# Altium PCB US-026-V1.3.PcbDoc
Units mm, origin at the board's own origin, x right, y up, seen from the top; angles counter-clockwise.
Board outline 43.94 x 19.94 mm, 2 copper layers (Top Layer, Bottom Layer); 10 components, 11 nets, 40 pads, 0 vias.
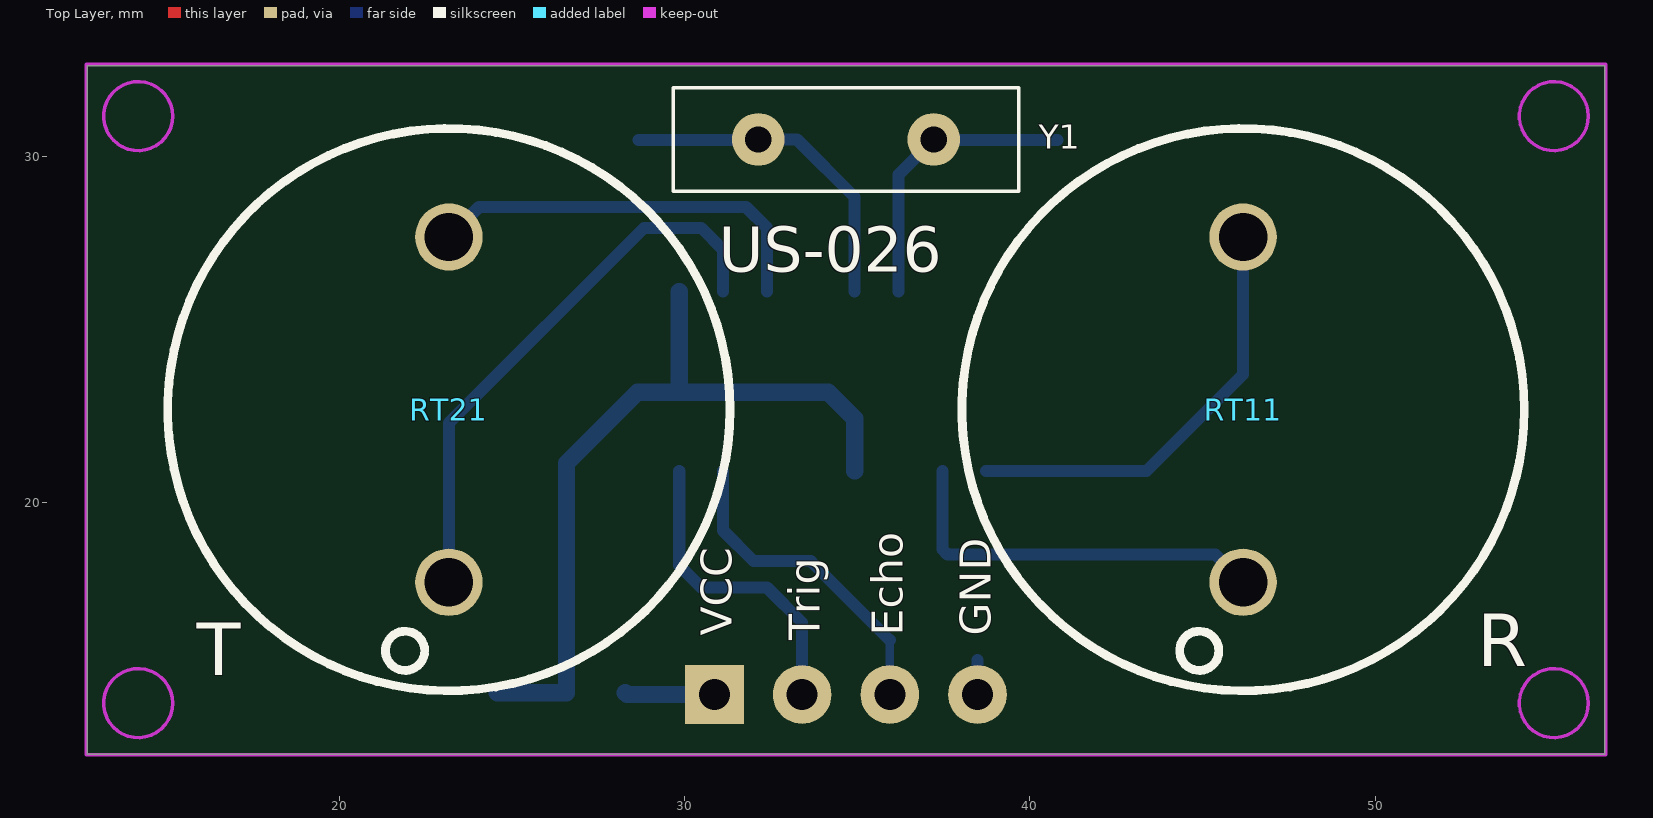
[diagram p0: Top Layer view]
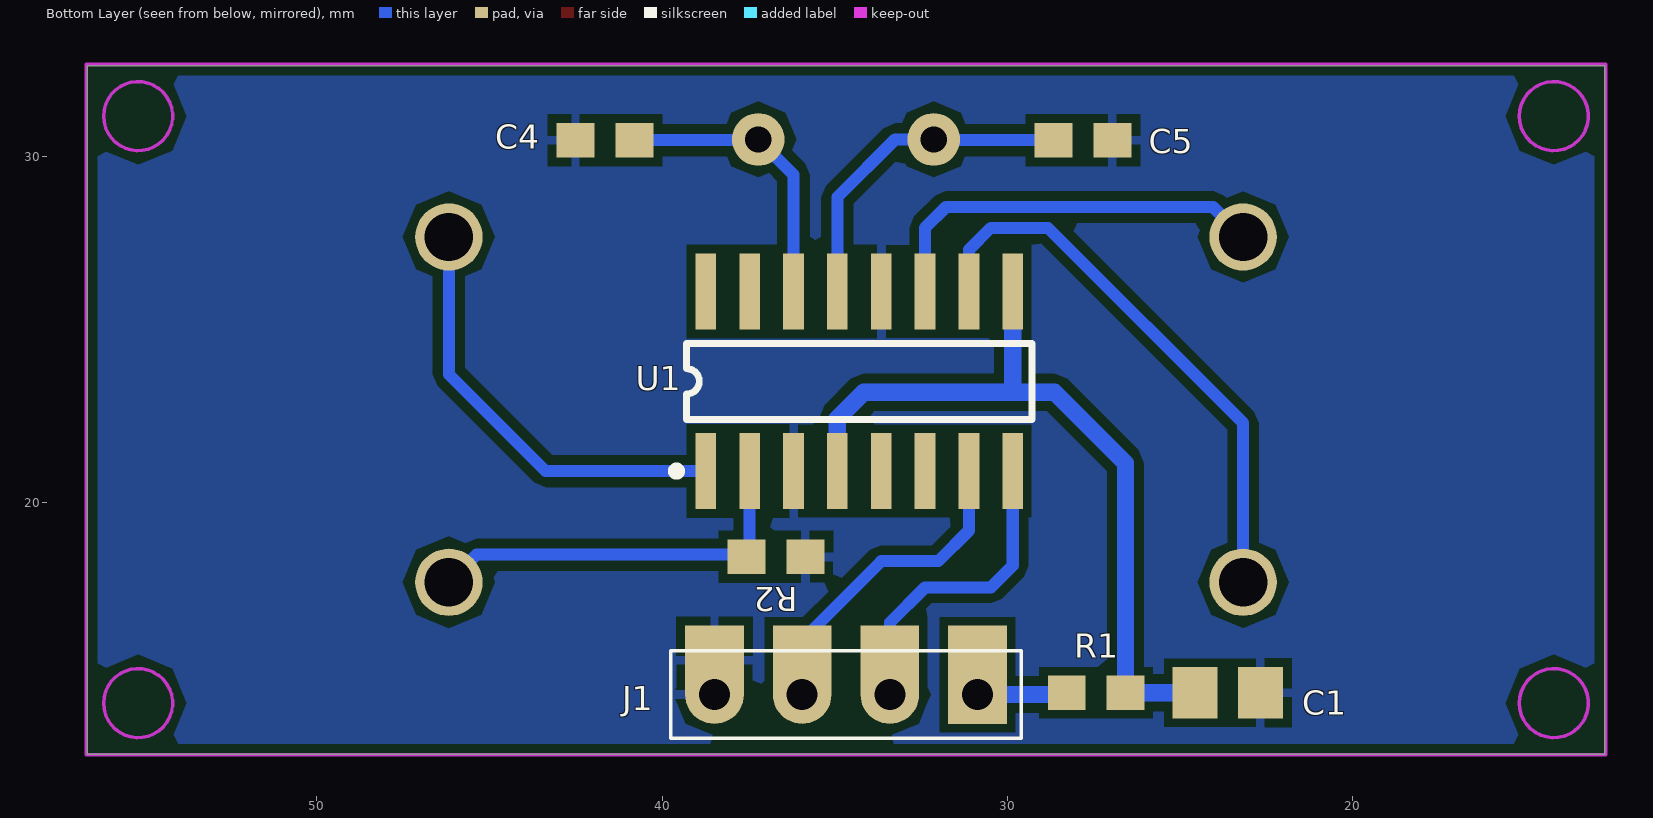
[diagram p1: Bottom Layer view, seen from below]

## Layer stack, top to bottom
Top Solder: solder mask 0.0102, Solder Resist, Dk 3.5
Top Layer: signal copper 0.0356
Dielectric1: dielectric 0.32, FR-4, Dk 4.8
Bottom Layer: signal copper 0.0356
Bottom Solder: solder mask 0.0102, Solder Resist, Dk 3.5

## Board outline
12.7,32.639 12.7,12.7 56.642,12.7 56.642,32.639 12.7,32.639

## Design rules (kind name [scope] priority, off if disabled: settings)
Clearance Clearance_1 [All] p1: gap=0.254
Clearance [All] p2: gap=0.254
FabricationTestPointUsage TestPointUsage [All] p1: valid=0 allowmultiple=FALSE
FabricationTestpoint Testpoint [All] p1: side=3 testpointundercomponent=TRUE minsize=1.016 maxsize=2.54 preferedsize=1.524 minholesize=0 maxholesize=1.016 preferedholesize=0.813 testpointgrid=0.025 allowsidetop=TRUE allowsidebottom=TRUE usegrid=TRUE gridtolerance=0
PolygonConnect [All] p1: connectstyle=Relief reliefconductorwidth=0.254 reliefentries=4 polygonreliefangle="90 Angle" airgapwidth=0.254
RoutingVias [All] p1: holewidth=0.5 width=0.8 viastyle="Through Hole" minholewidth=0.5 minwidth=0.8 maxholewidth=0.711 maxwidth=1.27
SolderMaskExpansion [All] p1: expansion=0.102
UnpouredPolygon [All] p1: allowunpoured=FALSE
Width [All] p1: maxlimit=1 minlimit=0.254 preferedwidth=0.254 minimp=50.000000 maximp=50.000000 favimp=50.000000
27 further rules are at their usual default settings.

## Components (designator, comment, footprint, x,y, rotation, side; value= is the part's Value field where it differs from the comment)
C1 "Cap" 2012[0805] 23.622,14.478 r0 bottom
C4 "Cap" 1608[0603] 41.656,30.48 r0 bottom
C5 "Cap" 1608[0603] 27.813,30.48 r180 bottom
J1 "Header 4" DIP4-22F 30.865,14.425 r0 bottom
R1 "Res2" 1608[0603] 27.432,14.478 r180 bottom
R2 "Res2" 1608[0603] 36.703,18.415 r0 bottom
RT11 "TC40K" US-16mm 46.175,22.675 r90 top locked
RT21 "TC40K" US-16mm 23.175,22.675 r90 top locked
U1 "CS100_SOP16" SOIC16 34.29,23.495 r180 bottom locked
Y1 "XTAL" XTAL 34.675,30.5 r180 top

## Footprints (in the part's own frame and the unit in brackets; to place one, negate y for a bottom-side part, rotate by r counter-clockwise, add the part's x,y. Pads: shape width x height; smd on the part's side, far side on the other; paste and mask are expansions set on the pad)
1608[0603] [mm] "Chip Capacitor; Body 1.6 x 0.8 mm (LxW typ)"
  rect 1.1x1 smd: 1(-0.85,0) 2(0.85,0)
2012[0805] [mm] "Chip Resistor; Body 2.0 x 1.3 mm (LxW typ)"
  rect 1.3x1.5 smd: 1(-0.95,0) 2(0.95,0)
DIP4-22F [mm]
  rect 1.7x2 smd: 1(0,-1) 2(2.54,-1) 3(5.08,-1) 4(7.62,-1)
  rect 1.7x1.7 hole 0.9: 1(0,0)
  round 1.7 hole 0.9: 2(2.54,0) 3(5.08,0) 4(7.62,0)
  silkscreen extent -1.27,-1.27 8.89,1.27
SOIC16 [mm] "Small Outline; 16 Leads; Body Width 3.9 mm; Pitch 1.27 mm"
  rect 0.6x2.2 smd: 1(-4.445,-2.6) 2(-3.175,-2.6) 3(-1.905,-2.6) 4(-0.635,-2.6) 5(0.635,-2.6) 6(1.905,-2.6) 7(3.175,-2.6) 8(4.445,-2.6) 9(4.445,2.6) 10(3.175,2.6) 11(1.905,2.6) 12(0.635,2.6) 13(-0.635,2.6) 14(-1.905,2.6) 15(-3.175,2.6) 16(-4.445,2.6)
  silkscreen extent -5.42,-2.72 5,1.1
US-16mm [mm]
  round 1.95 hole 1.4: +(-5,0) -(5,0)
  silkscreen extent -8.14,-8.14 8.14,8.14
XTAL [mil]
  round 60 hole 30: 1(-100,0) 2(100,0)
  silkscreen extent -197,-59 197,59

## Part data
C1 C4 C5: "Capacitor"
J1: "Header, 4-Pin"
R1 R2: "Resistor"
Y1: "Crystal Oscillator"

## Nets (pads, with @x,y where several pads share a name; then routed paths per layer and width w, separated by ;. In a path a pad name is that pad's centre, name@x,y a point inside that pad or via, vN(x,y) a via of type N, cw(c..) or ccw(c..) an arc to the next point about the centre after c; other vN are vias at no path point)
ECHO: J1.3 U1.7 | length 9.4
  Bottom Layer w0.254: J1.3@35.945,14.425 35.945,15.425 J1.3@35.945,15.998
  Bottom Layer w0.35: U1.7 31.115,19.177 32.004,18.288 33.655,18.288 J1.3@35.945,15.998
GND: C1.1 C4.2 C5.2 J1.4 R2.1 U1.3 U1.12 | length 1
  Bottom Layer w0.35: J1.4@38.485,14.425 J1.4@38.485,15.425
NetC4_1: C4.1 U1.14 Y1.1 | length 8.4
  Bottom Layer w0.35: U1.14 36.195,29.48 Y1.1 37.235,30.48 C4.1
NetC5_1: C5.1 U1.13 Y1.2 | length 9.7
  Bottom Layer w0.35: C5.1 32.115,30.48 Y1.2 33.254,30.5 34.925,28.829 U1.13
NetJ1_1: J1.1 R1.1 | length 2.6
  Bottom Layer w0.5: R1.1 28.335,14.425 J1.1@30.865,14.425
NetR2_2: R2.2 RT11.+ U1.2 | length 11.4
  Bottom Layer w0.35: U1.2 37.465,18.63 37.617,18.479 45.371,18.479 RT11.+
NetRT11_-: RT11.- U1.1 | length 12.6
  Bottom Layer w0.35: U1.1 43.374,20.895 46.175,23.696 RT11.-
S_TN: RT21.- U1.11 | length 11.7
  Bottom Layer w0.35: RT21.- 24.044,28.544 31.781,28.544 32.385,27.94 U1.11
S_TP: RT21.+ U1.10 | length 16.4
  Bottom Layer w0.35: RT21.+ 23.175,22.286 28.829,27.94 30.48,27.94 31.115,27.305 U1.10
TRIG: J1.2 U1.8 | length 9.1
  Bottom Layer w0.35: U1.8 29.845,18.161 30.48,17.526 32.385,17.526 33.405,16.506 33.405,15.425 J1.2@33.405,14.425
VCC: C1.2 R1.2 U1.4 U1.9 | length 22.6
  Bottom Layer w0.5: C1.2 R1.2 26.582,21.121 28.639,23.177 29.845,23.177 ; U1.9 29.845,23.177 ; U1.4 34.925,22.415 34.163,23.177 29.845,23.177
pads on no net: U1.5 U1.6 U1.15 U1.16

## Polygon pours and split planes (outlines as drawn)
GND on Bottom Layer "Top Layer-No Net" (solid, remove dead copper, pour order 2): 12.7,32.639 12.7,12.7 56.642,12.7 56.642,32.639 12.7,32.639

## Keep-outs
Keep-Out Layer:
  circle w0.1: c14.175,31.175 r1
  circle w0.1: c55.175,14.175 r1
  circle w0.1: c55.175,31.175 r1
  circle w0.1: c14.175,14.175 r1
  lines w0.1: 12.675,12.675 56.675,12.675 56.675,32.675 12.675,32.675 12.675,12.675

## Silkscreen, mask and mechanical layers (free items; w line width, h text height)
Top Overlay:
  text "US-026" at 30.988,26.67 h1.3
  text "VCC" at 31.369,16.129 h0.9 r90
  text "Echo" at 36.322,16.129 h0.9 r90
  text "GND" at 38.862,16.129 h0.9 r90
  text "Trig" at 33.909,16.002 h0.9 r90
  text "R" at 52.959,15.24 h1.52
  text "T" at 15.875,14.986 h1.52